# EAGLE board schematic (EAGLE 6.5.0)
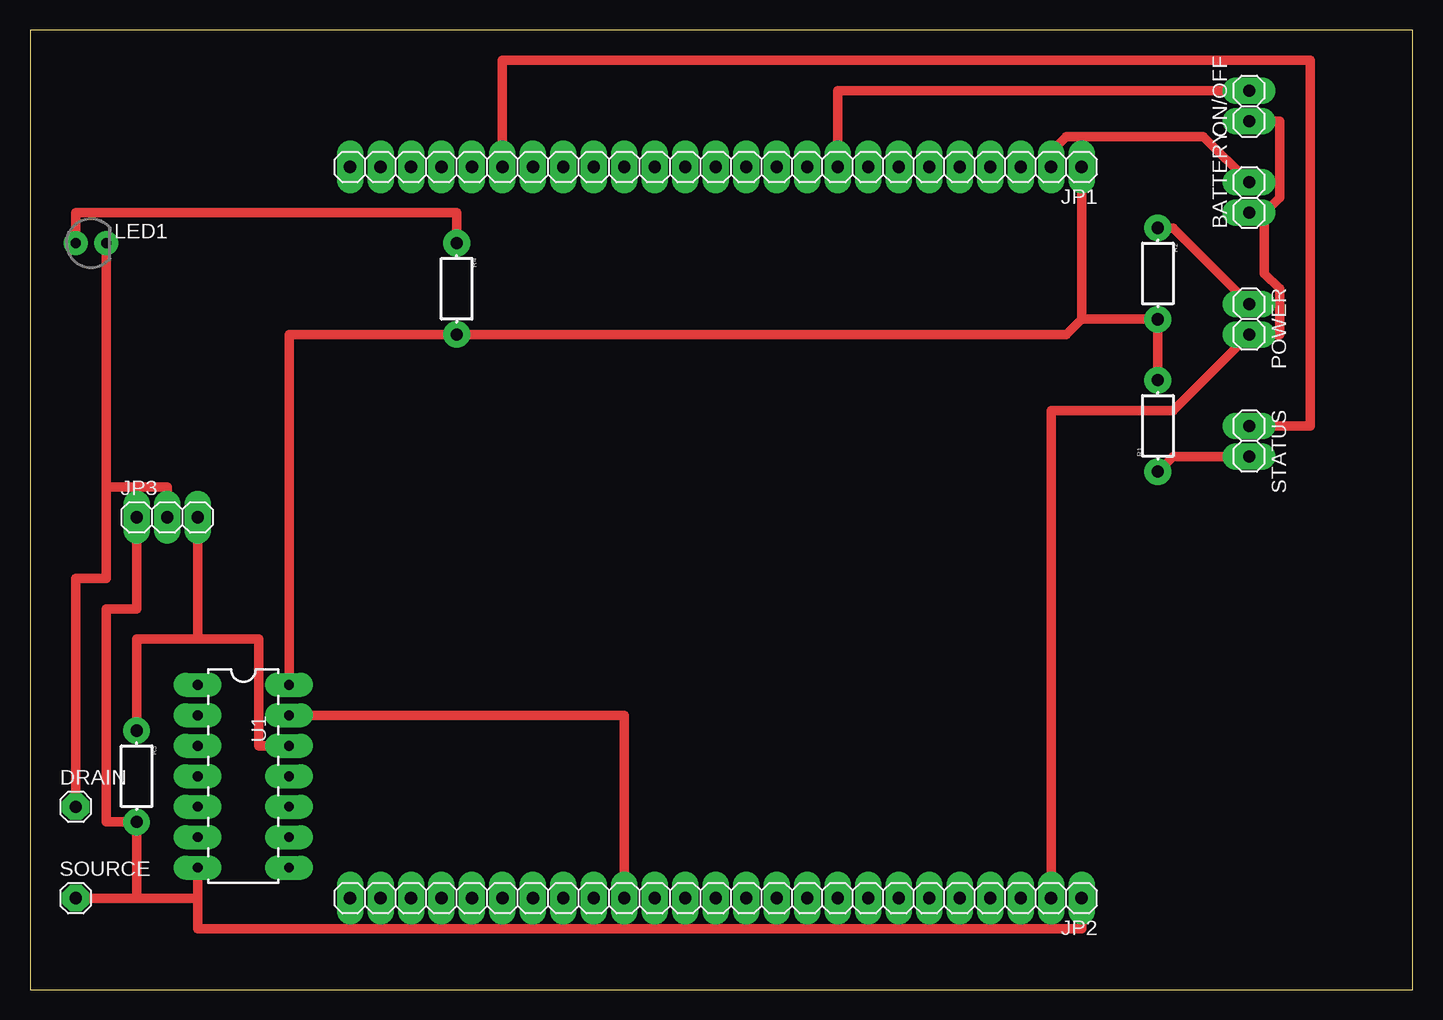
[diagram p0: board, top side]

Size 115.24 x 80 mm. Coordinates in mm from the lower left corner, seen from the top.
Outline: 0,0 115.24,0 115.24,80 0,80 0,0
Copper layers (1*16): Top 0.035mm / dielectric 1.5mm / Bottom 0.035mm
Design rules "default": minimum track width 0.8mm, minimum drill 0.8mm, track to track 0.8mm, track to pad 0.8mm, pad to pad 0.45mm, via to via 0.8mm, smd to smd 8mil, copper to edge 10mil, drill to drill 8mil, minimum pad ring 0.6mm, minimum via ring 0.6mm, stop-mask expansion 0mil, vias tented up to drill 0mil, thermal gap 10mil

## Footprints (pad centres in the part's own frame; a part is rotated, then mirrored left to right if it is on the bottom)
1X02 = drill 1.016 long: 1 -1.27,0; 2 1.27,0
1X01 = drill 1.016 octagon: 1 0,0
1X25 = drill 1.016 long: 1 -29.21,0; 2 -26.67,0; 3 -24.13,0; 4 -21.59,0; 5 -19.05,0; 6 -16.51,0; 7 -13.97,0; 8 -11.43,0; 9 -8.89,0; 10 -6.35,0; 11 -3.81,0; 12 -1.27,0; 13 1.27,0; 14 3.81,0; 15 6.35,0; 16 8.89,0; 17 11.43,0; 18 13.97,0; 19 16.51,0; 20 19.05,0; 21 21.59,0; 22 24.13,0; 23 26.67,0; 24 29.21,0; 25 31.75,0
1X03 = drill 1.016 long: 1 -2.54,0; 2 0,0; 3 2.54,0
LED3MM-NS = drill 0.813: A -1.27,0; K 1.27,0
AXIAL-0.3-KIT = drill 1.016 pad 2.032: P$1 -3.81,0; P$2 3.81,0
DIL14 = drill 0.813 long: 1 -8.89,-3.81; 2 -6.35,-3.81; 3 -3.81,-3.81; 4 -1.27,-3.81; 5 1.27,-3.81; 6 3.81,-3.81; 7 6.35,-3.81; 8 6.35,3.81; 9 3.81,3.81; 10 1.27,3.81; 11 -1.27,3.81; 12 -3.81,3.81; 13 -6.35,3.81; 14 -8.89,3.81

## Placement (x,y rotation side)
BATTERY  [1X02]  101.6,66.04 90 top
DRAIN  [1X01]  3.81,15.24 0 top
JP1  [1X25]  58.42,68.58 180 top
JP2  [1X25]  58.42,7.62 180 top
JP3  [1X03]  11.43,39.37 0 top
LED1  [LED3MM-NS]  5.08,62.23 0 top
ON/OFF  [1X02]  101.6,73.66 90 top
POWER  [1X02]  101.6,55.88 270 top
R1  [AXIAL-0.3-KIT]  93.98,46.99 90 top
R2  [AXIAL-0.3-KIT]  93.98,59.69 270 top
R3  [AXIAL-0.3-KIT]  8.89,17.78 270 top
R4  [AXIAL-0.3-KIT]  35.56,58.42 270 top
SOURCE  [1X01]  3.81,7.62 0 top
STATUS  [1X02]  101.6,45.72 270 top
U1  74HC04_HEX_INVERTER  [DIL14]  17.78,16.51 270 top

## Library data of the parts
BATTERY DRAIN JP1-JP3 ON/OFF POWER SOURCE STATUS = pinhead
LED1 R1-R4 U1 = SparkFun

## Nets
N$1: JP1.20 STATUS.1
N$2: R1.P$1 STATUS.2
N$3: BATTERY.1 JP2.2 ON/OFF.1 POWER.2
N$4: JP1.1 R1.P$2 R2.P$2 R4.P$2 U1.14
N$5: BATTERY.2 JP1.2
N$6: JP1.9 ON/OFF.2
N$7: JP2.16 U1.13
N$8: POWER.1 R2.P$1
N$9: JP2.1 JP3.1 R3.P$2 SOURCE.1 U1.7
N$12: JP3.3 R3.P$1 U1.12
N$13: DRAIN.1 JP3.2 LED1.K
N$14: LED1.A R4.P$1

## Tracks (layer width: path | path; a pad name or v marks a point on that pad's centre or on a via)
N$1
  Top 0.8: STATUS.1 106.68,46.99 106.68,77.47 39.37,77.47 JP1.20
N$2
  Top 0.8: R1.P$1 95.25,44.45 STATUS.2
N$3
  Top 0.8: 102.87,64.77 BATTERY.1 | 102.87,64.77 104.14,66.04 104.14,72.39 ON/OFF.1 | JP2.2 85.09,48.26 95.25,48.26 POWER.2 104.14,54.61 104.14,58.42 102.87,59.69 102.87,64.77
N$4
  Top 0.8: R1.P$2 R2.P$2 87.63,55.88 | 87.63,55.88 JP1.1 | 87.63,55.88 86.36,54.61 R4.P$2 21.59,54.61 U1.14
N$5
  Top 0.8: BATTERY.2 97.79,71.12 86.36,71.12 85.09,69.85 JP1.2
N$6
  Top 0.8: JP1.9 67.31,74.93 ON/OFF.2
N$7
  Top 0.8: U1.13 49.53,22.86 JP2.16
N$8
  Top 0.8: POWER.1 95.25,63.5 R2.P$1
N$9
  Top 0.8: SOURCE.1 8.89,7.62 | 8.89,7.62 13.97,7.62 U1.7 13.97,5.08 87.63,5.08 JP2.1 | 8.89,7.62 R3.P$2 6.35,13.97 6.35,31.75 8.89,31.75 JP3.1
N$12
  Top 0.8: U1.12 19.05,20.32 19.05,29.21 13.97,29.21 | R3.P$1 8.89,29.21 13.97,29.21 | 13.97,29.21 JP3.3
N$13
  Top 0.8: 6.35,41.91 6.35,34.29 3.81,34.29 DRAIN.1 | 6.35,41.91 LED1.K | JP3.2 11.43,41.91 6.35,41.91
N$14
  Top 0.8: LED1.A 3.81,64.77 35.56,64.77 R4.P$1